# Altium PCB PCB1.PcbDoc
Units mm, origin at the board's own origin, x right, y up, seen from the top; angles counter-clockwise.
Board outline 70 x 80 mm, 2 copper layers (Top Layer, Bottom Layer); 13 components, 40 nets, 120 pads, 0 vias.
Unrouted connection lines stored in the file: 1.
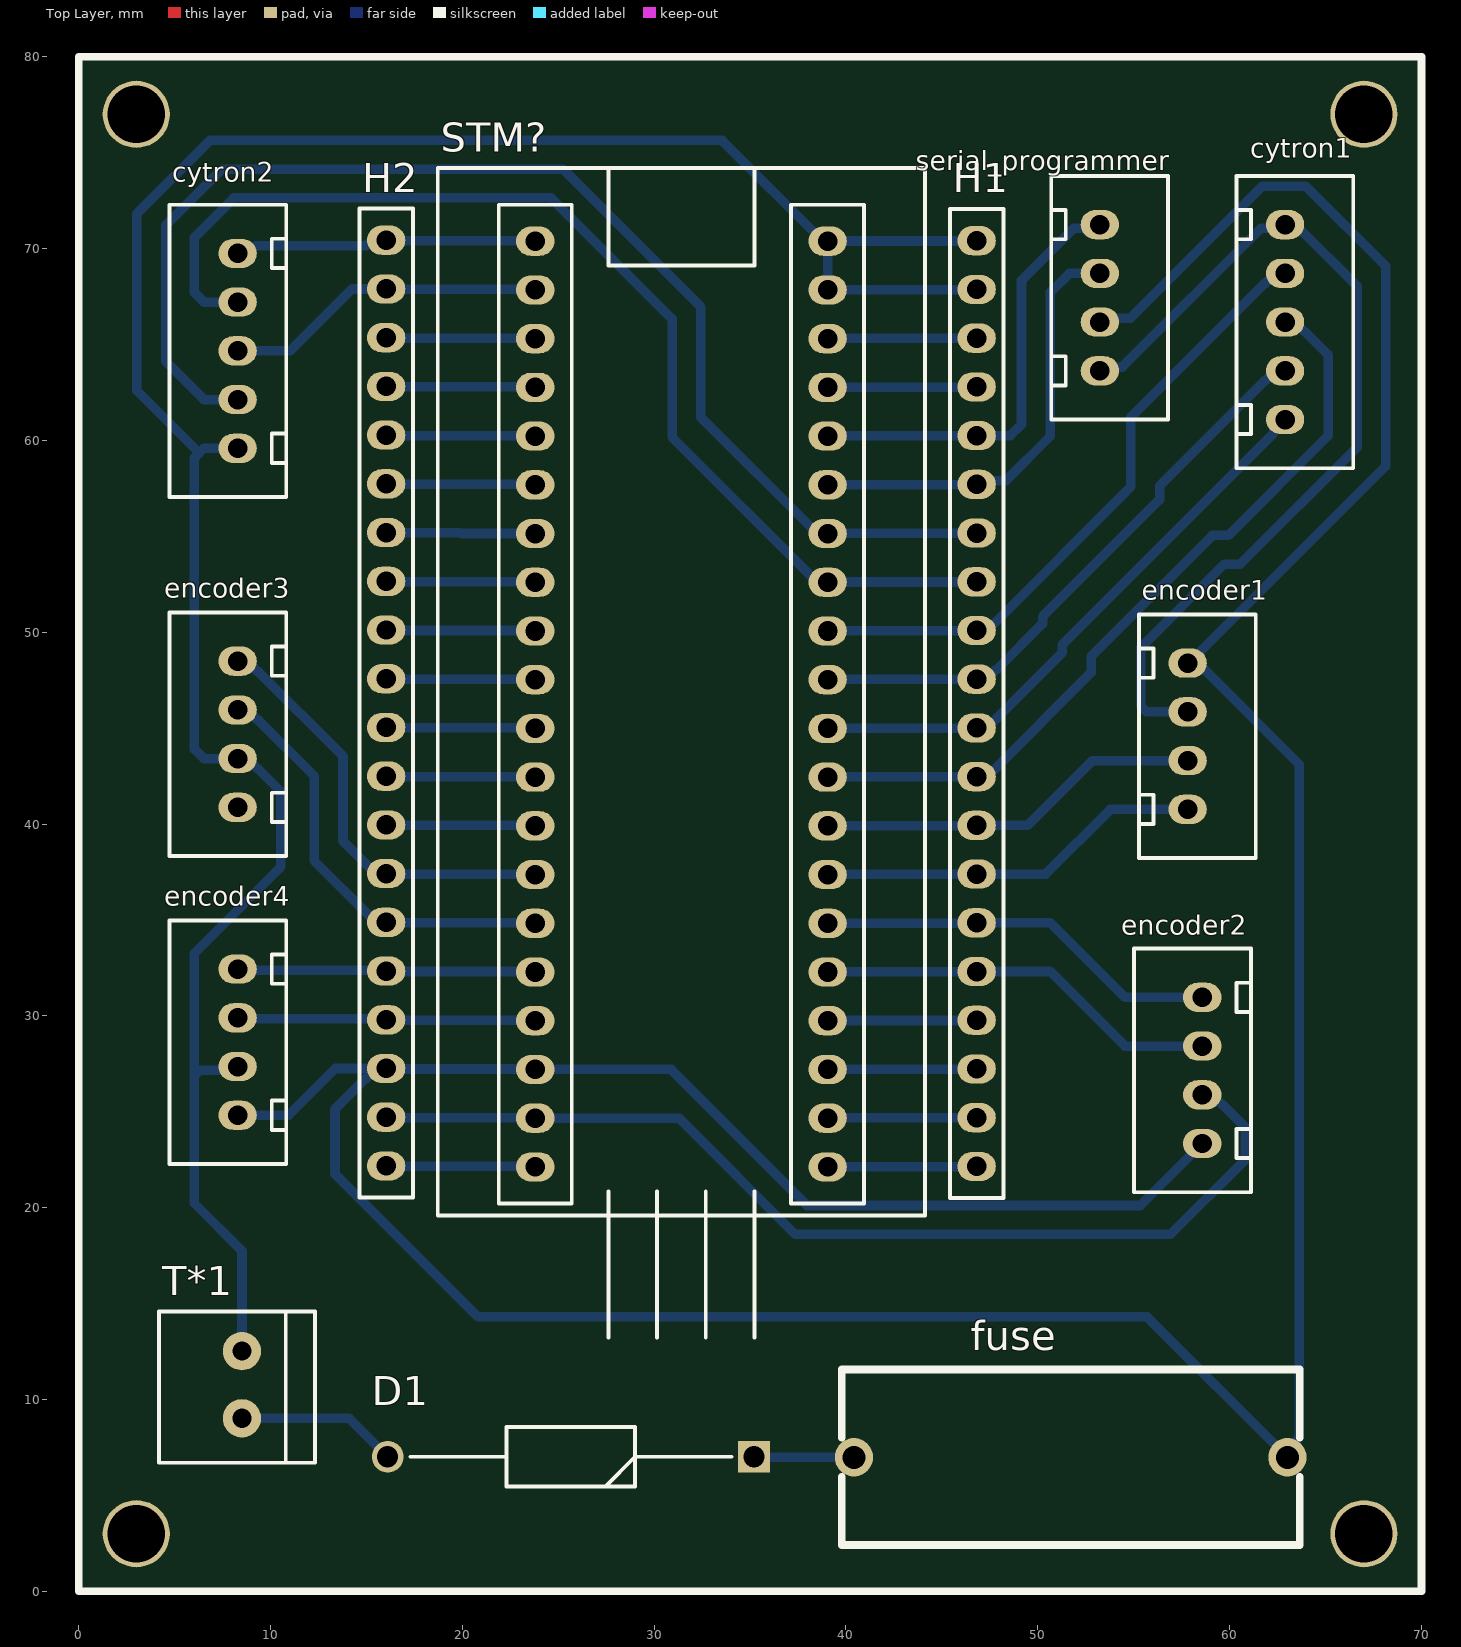
[diagram p0: Top Layer view]
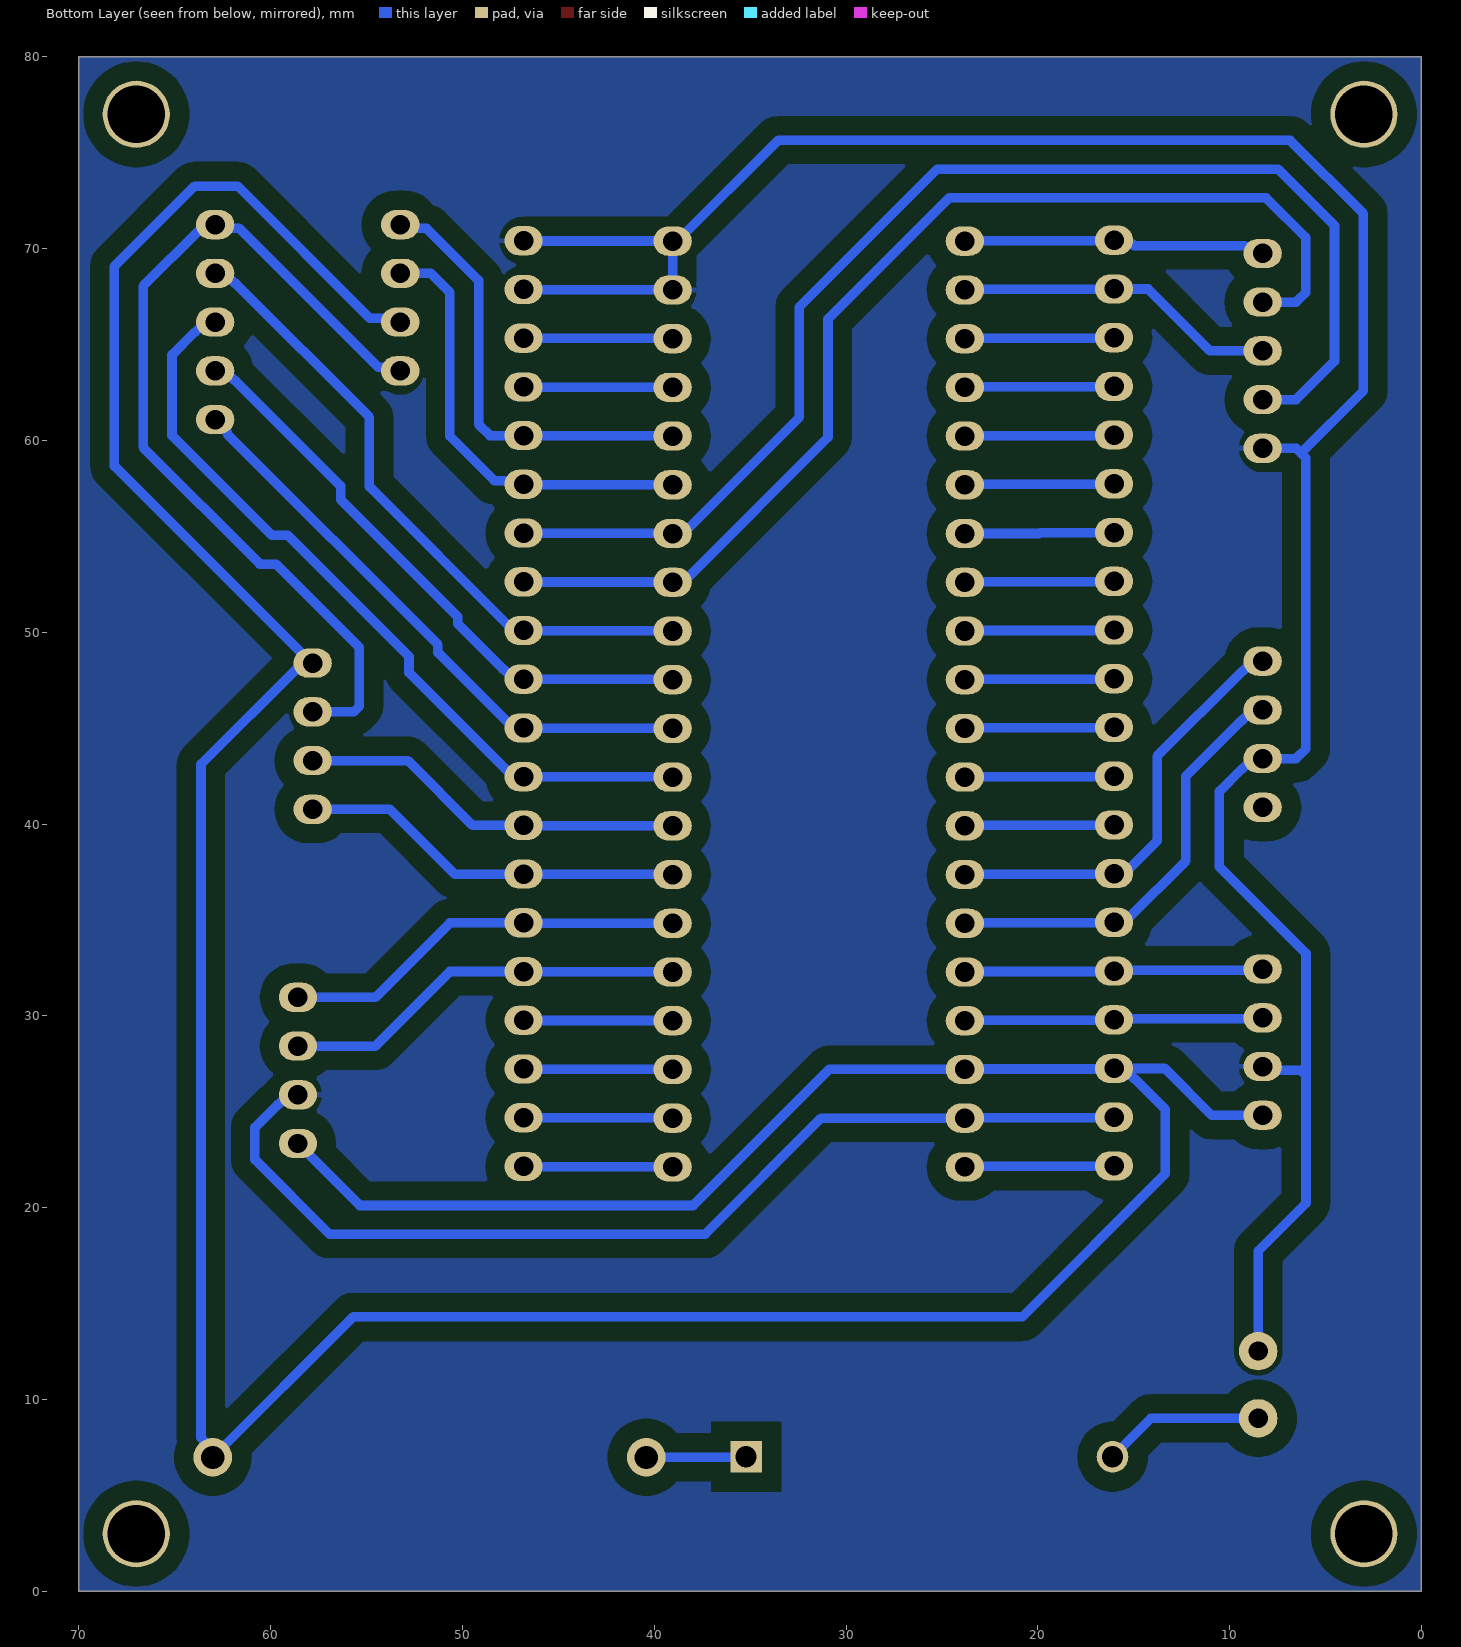
[diagram p1: Bottom Layer view, seen from below]

## Layer stack, top to bottom
Top Solder: solder mask 0.0102, Solder Resist, Dk 3.5
Top Layer: signal copper 0.0356
Dielectric 1: dielectric 0.32, FR-4, Dk 4.8
Bottom Layer: signal copper 0.0356
Bottom Solder: solder mask 0.0102, Solder Resist, Dk 3.5

## Board outline
0,0 0,80 70,80 70,0

## Design rules (kind name [scope] priority, off if disabled: settings)
Clearance [All] p1: gap=1 ignorepadtopadclearanceinfootprint=FALSE
PolygonConnect [All] p1: connectstyle=Relief reliefconductorwidth=0.254 reliefentries=4 polygonreliefangle="90 Angle" airgapwidth=0.254
RoutingLayers [All] p1: top layer_v5=FALSE bottom layer_v5=TRUE
RoutingVias [All] p1: holewidth=0.711 width=1.27 viastyle="Through Hole" minholewidth=0.711 minwidth=1.27 maxholewidth=0.711 maxwidth=1.27
SolderMaskExpansion [All] p1: expansion=0.102 istentingtop=FALSE
Width [All] p1: maxlimit=0.7 minlimit=0.254 preferedwidth=0.5
29 further rules are at their usual default settings.

## Components (designator, comment, footprint, x,y, rotation, side; value= is the part's Value field where it differs from the comment)
cytron1 "ATA_PIN_HEADER_5_2.54m" DATA_PIN_HEADER_5_2.54m 62.89,66.167 r270 top
cytron2 "DATA_PIN_HEADER_5_2.54m" DATA_PIN_HEADER_5_2.54m 8.28,64.668 r90 top
D1 "1N5817" DIOAD1910W90L670D310 35.204,7.01 r180 top
encoder1 "DATA_PIN_HEADER_4_2.54m" DATA_PIN_HEADER_4_2.54m 57.81,44.577 r270 top
encoder2 "DATA_PIN_HEADER_4_2.54m" DATA_PIN_HEADER_4_2.54m 58.572,27.153 r90 top
encoder3 "DATA_PIN_HEADER_4_2.54m" DATA_PIN_HEADER_4_2.54m 8.28,44.679 r90 top
encoder4 "DATA_PIN_HEADER_4_2.54m" DATA_PIN_HEADER_4_2.54m 8.28,28.626 r90 top
fuse "Fuse_Holder" Fuse_Holder 51.714,6.985 r0 top
H1 "FEMALE_HEADER_20" Female_Header_20 46.812,46.279 r270 top
H2 "FEMALE_HEADER_20" Female_Header_20 16.027,46.304 r270 top
serial_programmer "DATA_PIN_HEADER_4_2.54m" DATA_PIN_HEADER_4_2.54m 53.238,67.437 r270 top
STM? "STM32" STM32 31.42,46.253 r270 top
T*1 "Terminal_block_2pins_3.5mm" Terminal_block_2pins_3.5mm 8.509,10.767 r90 top

## Footprints (in the part's own frame and the unit in brackets; to place one, negate y for a bottom-side part, rotate by r counter-clockwise, add the part's x,y. Pads: shape width x height; smd on the part's side, far side on the other; paste and mask are expansions set on the pad)
DATA_PIN_HEADER_4_2.54m [mil]
  oval 60x78.74 hole 40: 1(-150,0) 2(-50,0) 3(50,0) 4(150,0)
  silkscreen extent -250,-100 250,140, body extent -244,-94 244,133, height 276
DATA_PIN_HEADER_5_2.54m [mil]
  oval 60x78.74 hole 40: 1(-200,0) 2(-100,0) 3(0,0) 4(100,0) 5(200,0)
  silkscreen extent -300,-100 300,140, body extent -293,-94 293,133, height 276
DIOAD1910W90L670D310 [mm]
  rect 1.65x1.65 hole 1.1: 1(0,0)
  round 1.65 hole 1.1: 2(19.1,0)
  silkscreen extent 1.18,-1.55 17.92,1.55, body extent -0.45,-1.8 19.55,1.8, height 3.59
Female_Header_20 [mil]
  oval 60x78.74 hole 40: 1(-950,0) 2(-850,0) 3(-750,0) 4(-650,0) 5(-550,0) 6(-450,0) 7(-350,0) 8(-250,0) 9(-150,0) 10(-50,0) 11(50,0) 12(150,0) 13(250,0) 14(350,0) 15(450,0) 16(550,0) 17(650,0) 18(750,0) 19(850,0) 20(950,0)
  silkscreen extent -1015,-55 1015,55, body extent -1010,-50 1010,50, height 336
Fuse_Holder [mm]
  round 2 hole 1.2: 1(-11.3,0) 2(11.3,0)
  silkscreen extent -11.94,-4.57 11.94,4.57, body extent -11.9,-4.5 11.9,4.5, height 13.5
STM32 [mm]
  oval 1.524x2 hole 1.02: 3V3@1(24.13,-7.62) 3V3@2(-19.05,7.62) 5V(19.05,-7.62) GND@1(21.59,-7.62) GND@2(-24.13,7.62) GND@3(-21.59,7.62) PA_0(13.97,7.62) PA_1(11.43,7.62) PA_2(8.89,7.62) PA_3(6.35,7.62) PA_4(3.81,7.62) PA_5(1.27,7.62) PA_6(-1.27,7.62) PA_7(-3.81,7.62) PA_8(-13.97,-7.62) PA_9(-11.43,-7.62) PA_10(-8.89,-7.62) PA_11(-6.35,-7.62) PA_12(-3.81,-7.62) PA_15(-1.27,-7.62) PB_0(-6.35,7.62) PB_1(-8.89,7.62) PB_3(1.27,-7.62) PB_4(3.81,-7.62) PB_5(6.35,-7.62) PB_6(8.89,-7.62) PB_7(11.43,-7.62) PB_8(13.97,-7.62) PB_9(16.51,-7.62) PB_10(-11.43,7.62) PB_11(-13.97,7.62) PB_12(-24.13,-7.62) PB_13(-21.59,-7.62) PB_14(-19.05,-7.62) PB_15(-16.51,-7.62) PC_13(21.59,7.62) PC_14(19.05,7.62) PC_15(16.51,7.62) RES(-16.51,7.62) VBT(24.13,7.62)
  silkscreen extent -27.94,-12.7 33.02,12.7, body extent -27.33,-11.43 31.09,11.43, height 21.6
Terminal_block_2pins_3.5mm [mm]
  round 2 hole 1: 1(-1.75,0) 2(1.75,0)
  silkscreen extent -4.06,-3.81 3.81,4.32, body extent -3.93,-3.4 3.52,4, height 8.51

## Part data
cytron1: library part DATA_PIN_HEADER_5_2.54m
D1: library part 1N5399, "Diode", Manufacturer_Name=onsemi, Mouser Part Number=512-1N5399, Datasheet Link=https://www.mouser.com/datasheet/2/308/1n5399-1190225.pdf, Manufacturer_Part_Number=1N5399, Mouser Price/Stock=https://www.mouser.co.uk/ProductDetail/onsemi-Fairchild/1N5399?qs=PIXeunmp7KMUmqT%252BO5XHUg%3D%3D
fuse: "Fuse Base Holder T5x20"
STM?: library part CMP-007-000000-1, Design Item ID=STM32, Source=MIA_LIBRARY.SchLib

## Free pads (board coordinates)
  round 3.5 hole 3: 3(67,77) 4(3,77) 5(3,3) 6(67,3)

## Nets (pads, with @x,y where several pads share a name; then routed paths per layer and width w, separated by ;. In a path a pad name is that pad's centre, name@x,y a point inside that pad or via, vN(x,y) a via of type N, cw(c..) or ccw(c..) an arc to the next point about the centre after c; other vN are vias at no path point)
A1: encoder1.3 H1.13 STM?.PA_3 | length 20.2
  Bottom Layer w0.5: STM?.PA_3 39.052,39.916 46.799,39.916 H1.13 49.466,39.929 52.845,43.307 encoder1.3
A2: encoder2.3 H1.16 STM?.PA_0 | length 21.3
  Bottom Layer w0.5: STM?.PA_0 39.052,32.296 H1.16@46.901,32.296 ; H1.16 H1.16@46.888,32.309 ; H1.16@46.914,32.283 H1.16@46.901,32.296 ; encoder2.3 54.537,28.423 50.651,32.309 H1.16@46.888,32.309 ; H1.16@46.888,32.309 H1.16@46.901,32.296
A3: encoder3.3 H2.15 STM?.PB_7 | length 22.7
  Bottom Layer w0.5: encoder3.3 8.796,45.949 9.323,45.421 9.352,45.421 12.277,42.495 12.277,38.081 15.288,35.07 15.831,35.07 16.053,34.849 23.774,34.849 STM?.PB_7
A4: encoder4.3 H2.17 STM?.PB_9 | length 15.6
  Bottom Layer w0.5: encoder4.3 8.331,29.845 15.773,29.845 15.85,29.769 23.774,29.769 STM?.PB_9
B1: encoder1.4 H1.14 STM?.PA_2 | length 20.2
  Bottom Layer w0.5: STM?.PA_2 39.065,37.363 39.078,37.376 46.799,37.376 H1.14 50.406,37.389 53.785,40.767 encoder1.4
B2: encoder2.4 H1.15 STM?.PA_1 | length 21.2
  Bottom Layer w0.5: STM?.PA_1 39.052,34.836 46.799,34.836 H1.15 50.651,34.849 54.537,30.963 encoder2.4
B3: encoder3.4 H2.14 STM?.PB_6 | length 22.7
  Bottom Layer w0.5: encoder3.4 8.796,48.489 9.323,47.961 9.352,47.961 13.777,43.535 13.777,39.121 15.288,37.61 15.831,37.61 H2.14 16.053,37.389 23.774,37.389 STM?.PB_6
B4: encoder4.4 H2.16 STM?.PB_8 | length 15.6
  Bottom Layer w0.5: encoder4.4 8.331,32.385 15.977,32.385 16.053,32.309 23.774,32.309 STM?.PB_8
DIR1: cytron1.5 H1.11 STM?.PA_5 | length 30.8
  Bottom Layer w0.5: STM?.PA_5 39.052,44.996 46.799,44.996 H1.11 47.008,45.205 47.552,45.205 51.281,48.934 51.281,49.353 62.265,60.336 62.265,60.422 62.89,61.048 cytron1.5
DIR2: cytron1.3 H1.12 STM?.PA_4 | length 41.1
  Bottom Layer w0.5: STM?.PA_4 39.052,42.456 46.799,42.456 H1.12 47.008,42.665 47.552,42.665 52.781,47.894 52.781,48.732 59.097,55.048 59.934,55.048 65.14,60.254 65.14,64.46 63.962,65.639 63.933,65.639 63.406,66.167 cytron1.3
DIR3: cytron2.5 H2.1 STM?.PB_12 | length 15.8
  Bottom Layer w0.5: cytron2.5 8.795,69.748 9.202,70.155 14.985,70.155 15.068,70.238 15.831,70.238 H2.1 16.053,70.409 STM?.PB_12@23.767,70.409 ; STM?.PB_12@23.792,70.383 STM?.PB_12
DIR4: cytron2.3 H2.2 STM?.PB_13 | length 16.9
  Bottom Layer w0.5: cytron2.3 11.024,64.668 14.25,67.894 H2.2 16.053,67.869 23.774,67.869 STM?.PB_13
GND: cytron1.1 cytron2.1 encoder1.2 encoder2.2 encoder3.2 encoder4.2 H1.1 H1.2 H2.19 serial_programmer.4 STM?.GND@1 STM?.GND@2 STM?.GND@3 T*1.2 | length 229.8
  Bottom Layer w0.5: 6.03,26.899 6.292,27.16 8.084,27.16 encoder4.2 ; cytron2.1 6.53,59.588 6.28,59.338 ; T*1.2 8.509,17.739 6.02,20.228 6.02,33.259 10.53,37.769 10.53,41.702 9.352,42.881 9.323,42.881 8.796,43.409 6.53,43.409 6.03,43.909 6.03,59.088 6.28,59.338 ; H2.19 16.053,24.689 23.774,24.689 23.8,24.663 31.295,24.663 37.347,18.611 56.925,18.611 60.822,22.509 60.822,24.176 59.644,25.355 59.615,25.355 59.062,25.908 58.572,25.908 encoder2.2 ; 39.04,67.843 39.052,67.856 46.799,67.856 H1.2 ; 39.04,68.387 39.04,70.383 ; H1.1 46.799,70.396 39.052,70.396 39.04,70.383 ; serial_programmer.4 53.434,63.823 54.396,63.823 61.625,71.051 62.694,71.051 cytron1.1 63.086,71.051 63.63,71.051 66.64,68.04 66.64,59.632 60.556,53.548 59.718,53.548 55.372,49.201 55.372,46.14 55.665,45.847 encoder1.2 ; 6.28,59.338 3.03,62.588 3.03,71.824 6.85,75.644 33.541,75.644 38.802,70.383 39.04,70.383
NetD1_1: D1.1 fuse.1 | length 5.2
  Bottom Layer w0.5: D1.1@35.23,6.985 fuse.1
NetD1_2: D1.2 T*1.1 | length 8.4
  Bottom Layer w0.5: T*1.1 14.098,9.017 D1.2
NetH1_3: H1.3 STM?.3V3@2 | length 7.8
  Bottom Layer w0.5: 39.04,65.303 39.052,65.316 46.799,65.316 H1.3
NetH1_4: H1.4 STM?.RES | length 7.8
  Bottom Layer w0.5: STM?.RES 39.052,62.776 46.799,62.776 H1.4
NetH1_17: H1.17 STM?.PC_15 | length 7.8
  Bottom Layer w0.5: STM?.PC_15 39.052,29.756 46.799,29.756 H1.17
NetH1_18: H1.18 STM?.PC_14 | length 7.8
  Bottom Layer w0.5: STM?.PC_14 39.052,27.216 46.799,27.216 H1.18
NetH1_19: H1.19 STM?.PC_13 | length 7.8
  Bottom Layer w0.5: STM?.PC_13 39.052,24.676 46.799,24.676 H1.19
NetH1_20: H1.20 STM?.VBT | length 7.8
  Bottom Layer w0.5: STM?.VBT 39.052,22.136 46.799,22.136 H1.20
NetH2_3: H2.3 STM?.PB_14 | length 7.8
  Bottom Layer w0.5: H2.3 16.053,65.329 23.774,65.329 STM?.PB_14
NetH2_4: H2.4 STM?.PB_15 | length 7.8
  Bottom Layer w0.5: H2.4 16.053,62.789 23.774,62.789 STM?.PB_15
NetH2_5: H2.5 STM?.PA_8 | length 7.8
  Bottom Layer w0.5: H2.5 16.053,60.249 23.774,60.249 STM?.PA_8
NetH2_6: H2.6 STM?.PA_9 | length 8
  Bottom Layer w0.5: H2.6@16.002,57.607 H2.6@16.027,57.633 ; H2.6 H2.6@16.027,57.633 ; STM?.PA_9 23.774,57.709 16.104,57.709 H2.6@16.027,57.633
NetH2_7: H2.7 STM?.PA_10 | length 7.8
  Bottom Layer w0.5: H2.7 19.882,55.194 19.933,55.143 STM?.PA_10
NetH2_8: H2.8 STM?.PA_11 | length 7.8
  Bottom Layer w0.5: H2.8 16.053,52.629 23.774,52.629 STM?.PA_11
NetH2_9: H2.9 STM?.PA_12 | length 7.8
  Bottom Layer w0.5: H2.9 16.053,50.089 23.774,50.089 STM?.PA_12
NetH2_10: H2.10 STM?.PA_15 | length 7.8
  Bottom Layer w0.5: H2.10 16.053,47.549 23.774,47.549 STM?.PA_15
NetH2_11: H2.11 STM?.PB_3 | length 7.8
  Bottom Layer w0.5: H2.11 16.053,45.009 23.774,45.009 STM?.PB_3
NetH2_12: H2.12 STM?.PB_4 | length 7.8
  Bottom Layer w0.5: H2.12 16.053,42.469 23.774,42.469 STM?.PB_4
NetH2_13: H2.13 STM?.PB_5 | length 7.8
  Bottom Layer w0.5: H2.13 16.053,39.929 23.774,39.929 STM?.PB_5
NetH2_20: H2.20 STM?.3V3@1 | length 7.8
  Bottom Layer w0.5: H2.20 16.053,22.149 23.774,22.149 23.8,22.123
PWM1: cytron1.4 H1.10 STM?.PA_6 | length 31.2
  Bottom Layer w0.5: STM?.PA_6 39.052,47.536 46.799,47.536 H1.10 47.327,47.549 47.855,48.077 47.884,48.077 50.249,50.442 50.249,50.809 56.351,56.911 56.351,57.631 61.819,63.099 61.847,63.099 62.375,63.627 cytron1.4
PWM2: cytron1.2 H1.9 STM?.PA_7 | length 33.7
  Bottom Layer w0.5: STM?.PA_7 39.052,50.076 46.799,50.076 H1.9 47.008,50.285 47.552,50.285 54.851,57.584 54.851,61.211 61.819,68.179 61.847,68.179 62.375,68.707 cytron1.2
PWM3: cytron2.4 H1.8 STM?.PB_0 | length 58.9
  Bottom Layer w0.5: cytron2.4 6.53,67.208 6.03,67.708 6.03,70.582 8.093,72.644 24.623,72.644 30.937,66.329 30.937,60.163 38.3,52.799 38.844,52.799 STM?.PB_0 39.052,52.616 46.799,52.616 H1.8
PWM4: cytron2.2 H1.7 STM?.PB_1 | length 66.4
  Bottom Layer w0.5: cytron2.2 6.53,62.128 4.53,64.128 4.53,71.203 7.471,74.144 25.244,74.144 32.437,66.951 32.437,61.203 38.3,55.339 38.844,55.339 STM?.PB_1 39.052,55.156 46.799,55.156 H1.7
Rx: H1.5 serial_programmer.1 STM?.PB_11 | length 23.2
  Bottom Layer w0.5: STM?.PB_11 39.052,60.236 46.799,60.236 H1.5 48.562,60.249 49.149,60.836 49.149,68.336 51.864,71.051 53.042,71.051 serial_programmer.1
Tx: H1.6 serial_programmer.2 STM?.PB_10 | length 23.2
  Bottom Layer w0.5: STM?.PB_10 39.052,57.696 46.799,57.696 46.812,57.683 47.034,57.905 48.339,57.905 50.649,60.214 50.649,67.715 51.641,68.707 serial_programmer.2
VCC: encoder1.1 encoder2.1 encoder3.1 encoder4.1 fuse.2 H2.18 serial_programmer.3 STM?.5V | length 206.7
  Bottom Layer w0.5: encoder4.1 10.935,24.816 13.373,27.254 H2.18@15.512,27.254 ; H2.18 H2.18@15.512,27.254 ; H2.18@16.104,27.229 23.774,27.229 STM?.5V 30.876,27.203 37.968,20.111 55.341,20.111 encoder2.1 ; serial_programmer.3 53.434,66.363 54.815,66.363 61.711,73.259 63.962,73.259 68.14,69.08 68.14,58.657 57.87,48.387 encoder1.1 58.006,48.191 58.55,48.191 63.627,43.114 63.627,8.003 63.014,7.391 fuse.2 55.693,14.306 20.812,14.306 13.36,21.758 13.36,25.131 14.956,26.726 14.984,26.726 H2.18@15.512,27.254

## Polygon pours and split planes (outlines as drawn)
GND on Bottom Layer "GND_L02_P000" (solid, pour order 0): 0,0 0,80 70,80 70,0

## Silkscreen, mask and mechanical layers (free items; w line width, h text height)
Top Overlay:
  the board outline again, w0.4